# EAGLE board Sport Analyzer 1.0.1 (EAGLE 9.6.2)
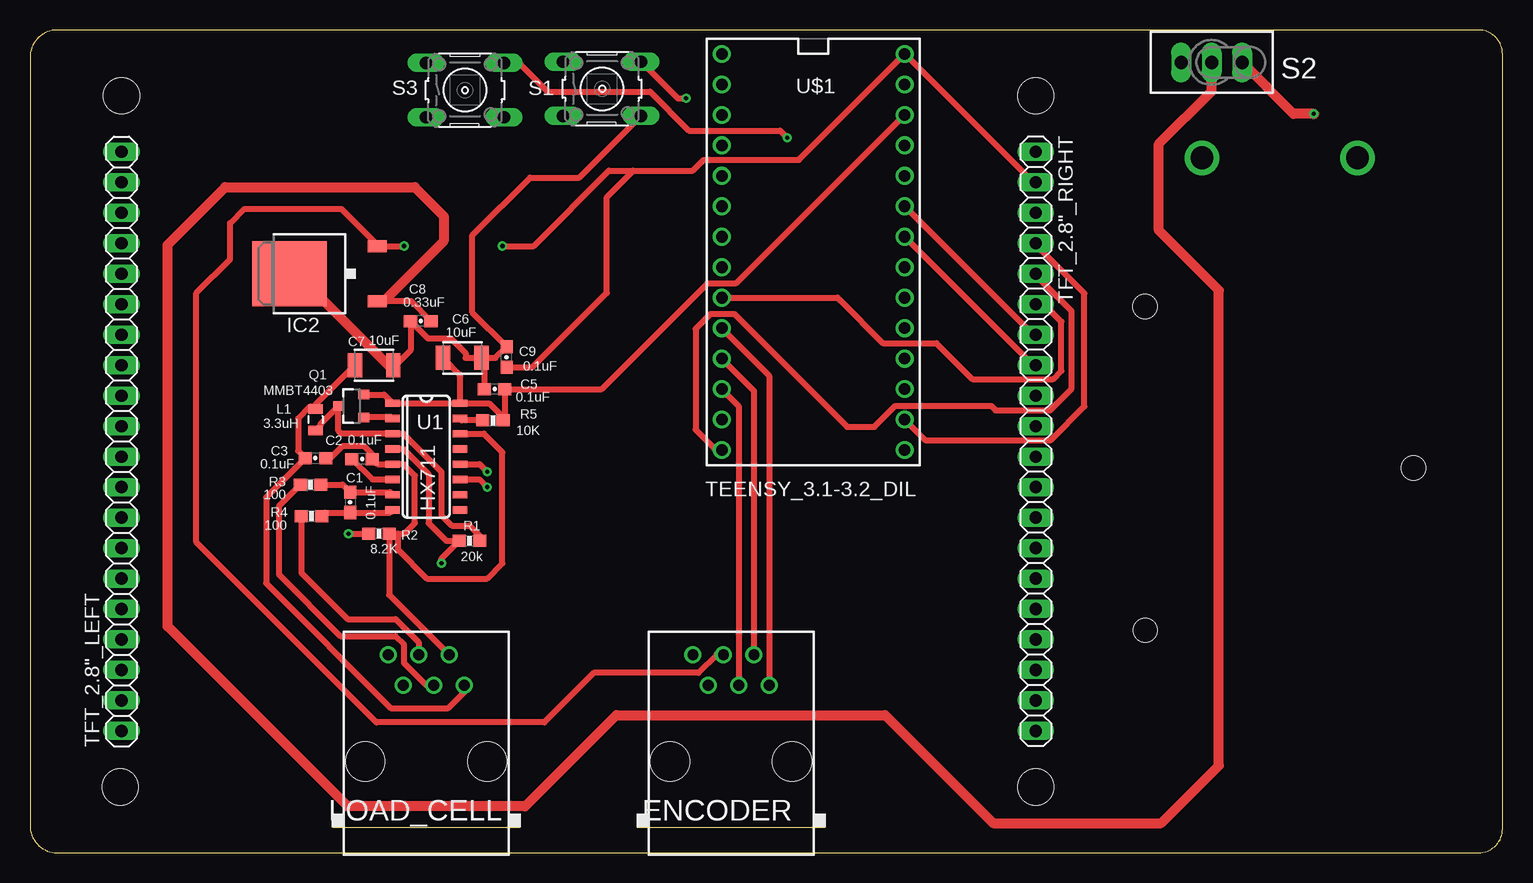
[diagram p0: board, top side]
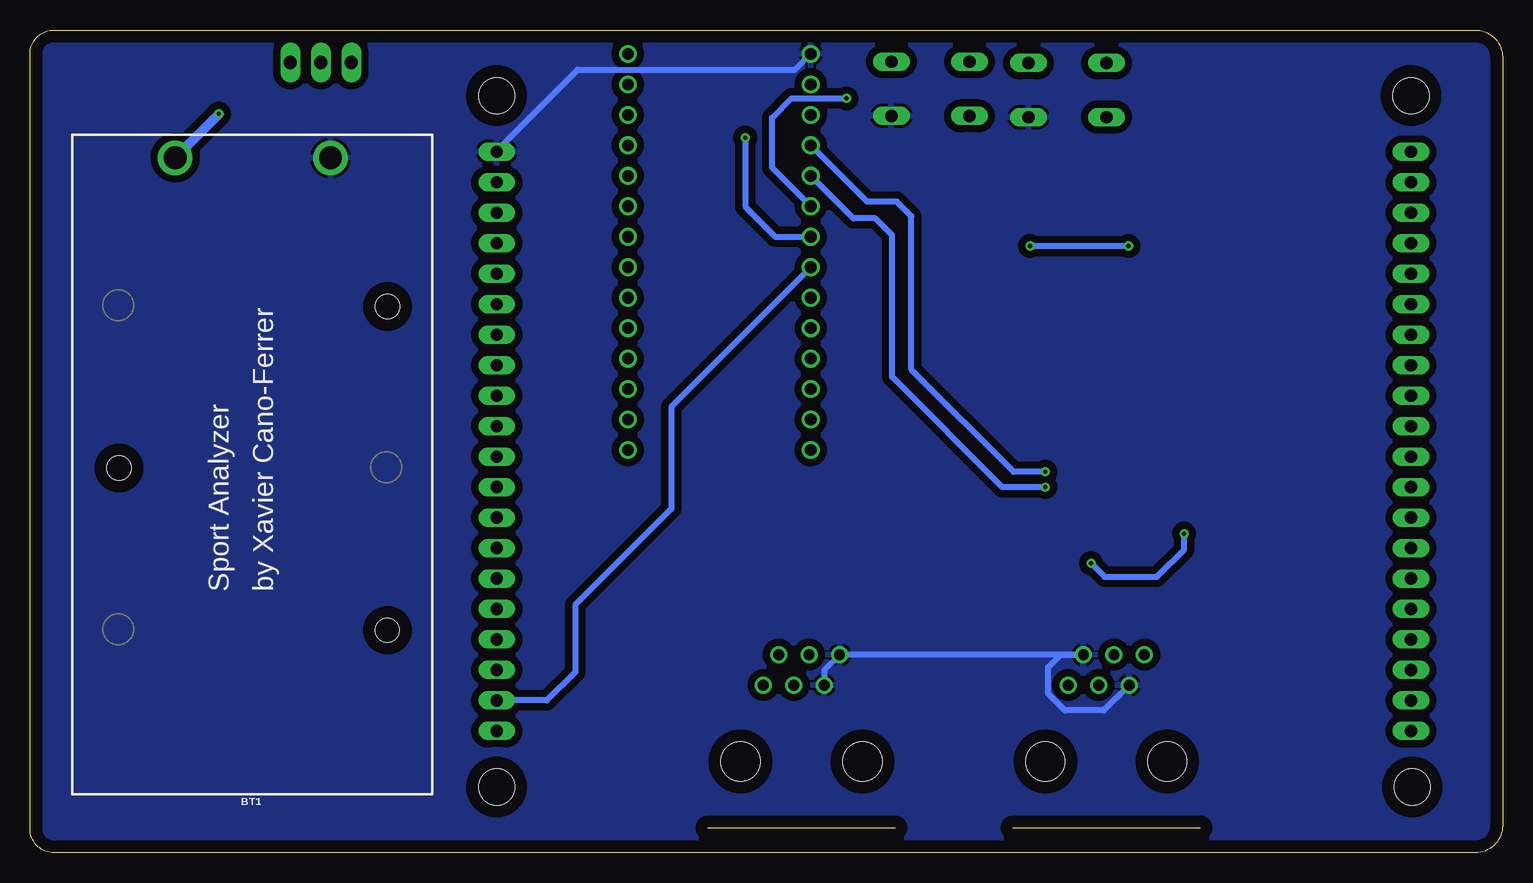
[diagram p1: board, bottom side, seen from below]

Size 122.71 x 68.57 mm. Coordinates in mm from the lower left corner, seen from the top.
Outline: 0,66.3 0,2.27 arc90 2.27,0 120.71,0 arc90 122.71,2 122.71,66.57 arc90 120.71,68.57 2.27,68.57 arc90 0,66.3
Copper layers (1*16): Top 0.035mm / dielectric 1.5mm / Bottom 0.035mm
Design rules "default": minimum track width 6mil, minimum drill 0.35mm, track to track 6mil, track to pad 6mil, pad to pad 6mil, via to via 6mil, smd to smd 6mil, copper to edge 40mil, drill to drill 6mil, minimum pad ring 10mil, minimum via ring 8mil, stop-mask expansion 4mil, vias tented up to drill 0mil, thermal gap 10mil
Holes 3 mm at 7.62,63.1 83.82,5.48 83.82,63.1 7.52,5.48
Holes 2 mm at 92.92,45.53 115.29,32.07 92.93,18.55

## Footprints (pad centres in the part's own frame; a part is rotated, then mirrored left to right if it is on the bottom)
BATTCON_9V = drill 1.905: + 0,0; - 0,-12.954
0603-CAP = smd 1.1 x 1: 1 -0.85,0; 2 0.85,0
1210 = smd 1.2 x 2: 1 -1.6,0; 2 1.6,0
RJ11-NO_SHIELD = drill 0.9 pad 1.4: 1 -3.175,8.89; 2 -1.905,6.35; 3 -0.635,8.89; 4 0.635,6.35; 5 1.905,8.89; 6 3.175,6.35 | hole 3.251: -5.08,0; 5.08,0
TO252 = smd 1 x 1.6: 1 -2.28,-4.8; 2 2.28,-4.8 | smd 5.4 x 6.2: 3 0,2.5
0805 = smd 0.8 x 1.2: 1 -0.9,0; 2 0.9,0
SOT23-3 = smd 0.8 x 0.9: 1 -0.95,-1; 2 0.95,-1; 3 0,1.1
0603-RES = smd 1.1 x 1: 1 -0.85,0; 2 0.85,0
B3F-10XX = drill 1.016 long: 1 -3.251,2.261; 2 3.251,2.261; 3 -3.251,-2.261; 4 3.251,-2.261
TL3XPO = drill 1.1 pad 1.422 long: 1 -2.54,0; 2 0,0; 3 2.54,0
1X20 = drill 1.016 long: 1 -24.13,0; 2 -21.59,0; 3 -19.05,0; 4 -16.51,0; 5 -13.97,0; 6 -11.43,0; 7 -8.89,0; 8 -6.35,0; 9 -3.81,0; 10 -1.27,0; 11 1.27,0; 12 3.81,0; 13 6.35,0; 14 8.89,0; 15 11.43,0; 16 13.97,0; 17 16.51,0; 18 19.05,0; 19 21.59,0; 20 24.13,0
SO16 = smd 0.6 x 1.2: 1 -4.445,-2.8; 2 -3.175,-2.8; 3 -1.905,-2.8; 4 -0.635,-2.8; 5 0.635,-2.8; 6 1.905,-2.8; 7 3.175,-2.8; 8 4.445,-2.8; 9 4.445,2.8; 10 3.175,2.8; 11 1.905,2.8; 12 0.635,2.8; 13 -0.635,2.8; 14 -1.905,2.8; 15 -3.175,2.8; 16 -4.445,2.8
TEENSY_3.0-3.2&LC_DIL = drill 0.965: 0 -7.62,13.97; 1 -7.62,11.43; 2 -7.62,8.89; 3 -7.62,6.35; 3.3V 7.62,11.43; 4 -7.62,3.81; 5 -7.62,1.27; 6 -7.62,-1.27; 7 -7.62,-3.81; 8 -7.62,-6.35; 9 -7.62,-8.89; 10 -7.62,-11.43; 11 -7.62,-13.97; 12 -7.62,-16.51; 13 7.62,-16.51; 14/A0 7.62,-13.97; 15/A1 7.62,-11.43; 16/A2 7.62,-8.89; 17/A3 7.62,-6.35; 18/A4 7.62,-3.81; 19/A5 7.62,-1.27; 20/A6 7.62,1.27; 21/A7 7.62,3.81; 22/A8 7.62,6.35; 23/A9 7.62,8.89; AGND 7.62,13.97; GND -7.62,16.51; VIN 7.62,16.51

## Placement (x,y rotation side)
BT1  [BATTCON_9V]  110.62,57.91 90 bottom
C1  0.1uF  [0603-CAP]  26.67,29.21 270 top
C2  0.1uF  [0603-CAP]  27.67,32.82 180 top
C3  0.1uF  [0603-CAP]  23.79,32.89 0 top
C5  0.1uF  [0603-CAP]  38.71,38.64 180 top
C6  10uF  [1210]  36.03,41.24 0 top
C7  10uF  [1210]  28.67,40.64 0 top
C8  0.33uF  [0603-CAP]  32.56,44.32 180 top
C9  0.1uF  [0603-CAP]  39.71,41.32 90 top
ENCODER  RJ11-2L-B  [RJ11-NO_SHIELD]  58.42,7.62 0 top
IC2  7805DT  [TO252]  24.13,48.26 90 top
L1  3.3uH  [0805]  23.79,36.1 270 top
LOAD_CELL  RJ11-2L-B  [RJ11-NO_SHIELD]  33.02,7.62 0 top
Q1  MMBT4403  [SOT23-3]  26.8,37.23 90 top
R1  20k  [0603-RES]  36.63,26 0 top
R2  8.2K  [0603-RES]  29.08,26.6 180 top
R3  100  [0603-RES]  23.39,30.68 0 top
R4  100  [0603-RES]  23.46,28.07 0 top
R5  10K  [0603-RES]  38.57,36.03 0 top
S1  [B3F-10XX]  47.67,63.67 0 top
S2  TL32PO  [TL3XPO]  98.47,65.87 180 top
S3  [B3F-10XX]  36.25,63.56 0 top
TFT_2.8"_LEFT  [1X20]  7.62,34.29 90 top
TFT_2.8"_RIGHT  [1X20]  83.82,34.29 270 top
U1  HX711  [SO16]  33.02,33.02 270 top
U$1  TEENSY_3.1-3.2_DIL  [TEENSY_3.0-3.2&LC_DIL]  65.27,50.07 0 top

## Library data of the parts
BT1 = SparkFun-Batteries; PROD_ID: BATT-10855
C1-C3 C5 C8 C9 = SparkFun-Capacitors; PROD_ID: CAP-08604
C6 C7 = SparkFun-Capacitors; PROD_ID: CAP-09824
ENCODER LOAD_CELL = con-tycoelectronics; MF: TYCO ELECTRONICS; MPN: RJ11-2L-B; OC_FARNELL: unknown; OC_NEWARK: 83F4463
IC2 = linear
L1 = SparkFun-Passives; PROD_ID: NDUC-13076
Q1 = SparkFun-DiscreteSemi; PROD_ID: TRANS-09245
R1 = SparkFun-Resistors; PROD_ID: RES-09383
R2 = SparkFun-Resistors; PROD_ID: RES-10646
R3 R4 = SparkFun-Resistors; PROD_ID: RES-07863
R5 = SparkFun-Resistors; PROD_ID: RES-00824
S1 S3 = switch-omron; MPN: B3F-1000; OC_FARNELL: 176432; OC_NEWARK: 36M3542
S2 = switch
TFT_2.8"_LEFT TFT_2.8"_RIGHT = pinhead
U1 = Testing; PROD_ID: IC-12445
U$1 = Teensy_3_and_LC_Series_Boards_v1.4

## Nets
9V: C8.1 IC2.1 S2.2
A+: LOAD_CELL.3 R4.1
A-: LOAD_CELL.4 R3.1
AGND: U$1.AGND
AVDD: C3.1 C7.1 L1.1 LOAD_CELL.6
CLK: TFT_2.8"_RIGHT.4 U$1.14/A0
CS: TFT_2.8"_RIGHT.7 U$1.21/A7
D/C: TFT_2.8"_RIGHT.8 U$1.20/A6
DAT: U1.12 U$1.2
ENC_A: ENCODER.6 U$1.8
ENC_B: ENCODER.5 U$1.9
ENC_Z: ENCODER.4 U$1.10
GND: BT1.- C2.1 C3.2 C5.2 C6.2 C7.2 C8.2 C9.2 ENCODER.1 ENCODER.2 IC2.3 LOAD_CELL.2 LOAD_CELL.5 R2.1 S1.4 S3.4 TFT_2.8"_RIGHT.1 U1.5 U1.14 U$1.GND
MISO: TFT_2.8"_RIGHT.5 U$1.12
MOSI: TFT_2.8"_RIGHT.6 U$1.7
N$1: R5.1 U1.15
N$2: C1.1 R3.2 U1.7
N$3: C1.2 R4.2 U1.8
N$4: Q1.1 U1.2
N$5: L1.2 Q1.3 R1.2 U1.3
N$6: R1.1 R2.2 U1.4
N$7: C2.2 U1.6
N$8: S1.2 U$1.4
N$9: S3.2 U$1.5
N$42: BT1.+ S2.1
SCK: U1.11 U$1.3
SD_CS: TFT_2.8"_RIGHT.19 U$1.6
VCC: C9.1 ENCODER.3 IC2.2 TFT_2.8"_RIGHT.2 U$1.VIN
VDD: C5.1 C6.1 Q1.2 R5.2 U1.1 U1.16 U$1.3.3V

## Tracks (layer width: path | path; a pad name or v marks a point on that pad's centre or on a via)
9V
  Top 0.508: C8.1 31.75,45.98 29.47,45.98 IC2.1
  Top 0.813: 29.47,45.98 34.47,50.98 34.47,53.07 32.07,55.47 16.27,55.47 11.47,50.67 11.47,18.87 26.47,3.87 41.27,3.87 48.87,11.47 71.27,11.47 80.27,2.47 94.27,2.47 99.07,7.27 99.07,46.87 94.07,51.87 94.07,59.08 98.47,63.48 S2.2
A+
  Top 0.508: R4.1 22.61,23.33 26.47,19.47 30.47,19.47 32.38,17.55 LOAD_CELL.3
A-
  Top 0.508: LOAD_CELL.4 33.02,13.97 31.16,15.83 31.16,17.37 30.45,18.07 25.87,18.07 20.74,23.2 20.74,28.88 R3.1
AVDD
  Top 0.508: C7.1 23.79,37.36 L1.1 23.62,37.17 23.32,37.17 22.34,36.19 22.34,33.49 C3.1 19.67,29.62 19.67,22.47 30.07,12.07 34.87,12.07 36.2,13.39 LOAD_CELL.6
CLK
  Top 0.508: TFT_2.8"_RIGHT.4 83.82,50.67 87.87,46.62 87.87,37.2 85.07,34.39 74.6,34.39 U$1.14/A0
CS
  Top 0.508: U$1.21/A7 83.59,43.18 TFT_2.8"_RIGHT.7
D/C
  Top 0.508: U$1.20/A6 83.59,40.64 TFT_2.8"_RIGHT.8
DAT  (via drill 0.35)
  Top 0.508: U1.12 37.47,32.38 v38.1,31.75
  Bottom 0.508: v38.1,31.75 40.75,31.75 49.27,40.27 49.27,53.07 50.47,54.27 52.96,54.27 U$1.2
ENC_A
  Top 0.508: U$1.8 61.6,39.78 ENCODER.6
ENC_B
  Top 0.508: U$1.9 60.33,38.51 ENCODER.5
ENC_Z
  Top 0.508: U$1.10 59.05,37.24 ENCODER.4
GND
  Top 0.508: C2.1 28.95,32.38 U1.5 31.11,32.38 32.07,31.43 32.07,27.47 31.2,26.6 30.67,26.6 | C2.1 28.32,33.02 | 35.78,34.89 U1.14 37.82,34.93 39.37,33.38 39.37,24.13 38.1,22.86 33.07,22.86 30.67,25.26 30.67,26.6 | C7.2 30.47,40.64 31.71,41.88 C8.2 33.16,42.87 35.07,42.87 36.3,41.64 36.3,41.24 C6.2 | C2.1 28.52,33.22 27.87,33.87 26.02,33.87 25.04,32.89 C3.2 | C6.2 37.86,41.01 C5.2 | C6.2 38.78,41.24 C9.2 36.87,45.01 36.87,51.47 41.67,56.27 45.78,56.27 S1.4 | 30.67,26.6 R2.1 29.93,21.5 LOAD_CELL.5
  Top 0.813: IC2.3 22.23,48.26 29.85,40.64 C7.2
  Bottom 0.508: LOAD_CELL.2 33.22,11.87 36.47,11.87 37.87,13.27 37.87,15.47 36.83,16.51 LOAD_CELL.5 ENCODER.1 56.52,15.24 ENCODER.2 | U$1.GND 58.96,65.27 77.07,65.27 83.82,58.52 TFT_2.8"_RIGHT.1
  pour Bottom (isolate 0.61): 120.84,68.58 2,68.58 arc90 0,66.58 0,2 arc90 2,0 121.57,0 122.84,1.27 122.84,66.58 arc90
MISO
  Top 0.508: TFT_2.8"_RIGHT.5 83.82,48.13 86.81,45.14 86.81,38.68 85,36.87 80.47,36.87 80.1,37.24 72.11,37.24 70.36,35.5 68.09,35.5 58.67,44.92 56.72,44.92 55.47,43.67 55.47,35.27 57.18,33.56 U$1.12
MOSI
  Top 0.508: TFT_2.8"_RIGHT.6 84.49,45.72 85.95,44.26 85.95,40.16 85.27,39.47 78.53,39.47 75.54,42.47 71.07,42.47 67.51,46.03 67.28,46.26 U$1.7
N$1
  Top 0.508: R5.1 35.99,36.03 U1.15
N$2
  Top 0.508: R3.2 26.05,30.68 C1.1 30,30.06 U1.7
N$3
  Top 0.508: U1.8 30,28.36 C1.2 24.6,28.36 R4.2
N$4
  Top 0.508: U1.2 30.13,36.28 Q1.1
N$5
  Top 0.508: R1.2 37.48,26.42 36.63,27.27 35.16,27.27 34.29,28.14 34.29,31.75 31.11,34.93 U1.3 25.93,34.93 25.7,35.16 Q1.3 24.22,35.75 24.22,35.63 L1.2
N$6  (via drill 0.35)
  Top 0.508: U1.4 31.11,33.66 33.22,31.55 33.22,27.47 34.69,26 R1.1 34.29,24.51 v34.29,24.13 | v26.54,26.6 R2.2
  Bottom 0.508: v34.29,24.13 33.15,22.99 28.81,22.99 26.54,25.26 v26.54,26.6
N$7
  Top 0.508: C2.2 28.52,31.11 U1.6
N$8  (via drill 0.35)
  Top 0.508: S1.2 53.98,62.87 v54.67,62.87
  Bottom 0.508: U$1.4 60.87,57.1 60.87,61.27 59.27,62.87 v54.67,62.87
N$9  (via drill 0.35)
  Top 0.508: S3.2 40.75,65.82 43.14,63.43 51.67,63.43 54.91,60.19 62.5,60.19 v63.1,59.59
  Bottom 0.508: v63.1,59.59 63.1,53.85 60.59,51.34 U$1.5
N$42  (via drill 0.35)
  Top 0.813: v106.98,61.59 105.29,61.59 S2.1
  Bottom 0.813: BT1.+ 106.98,61.55 v106.98,61.59
SCK  (via drill 0.35)
  Top 0.508: U1.11 37.47,31.11 v38.1,30.48
  Bottom 0.508: v38.1,30.48 41.68,30.48 50.87,39.67 50.87,51.47 52.27,52.87 54.1,52.87 U$1.3
SD_CS
  Bottom 0.508: U$1.6 69.27,37.18 69.27,28.67 77.27,20.67 77.27,15.07 79.64,12.7 TFT_2.8"_RIGHT.19
VCC  (via drill 0.35)
  Top 0.508: ENCODER.3 57.22,16.51 55.71,15 47,15 42.87,10.87 28.87,10.87 13.87,25.87 13.87,46.67 16.67,49.47 16.67,52.47 17.87,53.67 25.94,53.67 29.07,50.54 IC2.2 31,50.54 31.07,50.47 v31.17,50.57 | 50.27,56.84 48.24,56.84 41.97,50.57 v39.37,50.57 | 50.27,56.84 48.07,54.64 48.07,46.67 41.87,40.47 C9.1 | 50.27,56.84 55.24,56.84 56.16,57.76 64.07,57.76 U$1.VIN 83.59,55.88 TFT_2.8"_RIGHT.2
  Bottom 0.508: v31.17,50.57 39.17,50.57 39.27,50.47 v39.37,50.57
VDD
  Top 0.508: Q1.2 29.5,38.18 U1.1 U1.16 | C6.1 35.82,39.85 U1.16 | U$1.3.3V 58.86,47.47 56.47,47.47 47.64,38.64 C5.1 39.56,36.17 | 39.56,36.17 R5.2 | U1.16 38.27,37.47 39.56,36.17

## Text on the board
bNames: by Xavier Cano-Ferrer | Sport Analyzer